# EAGLE board mega_simplest_classboard_redux (EAGLE 6.5.0)
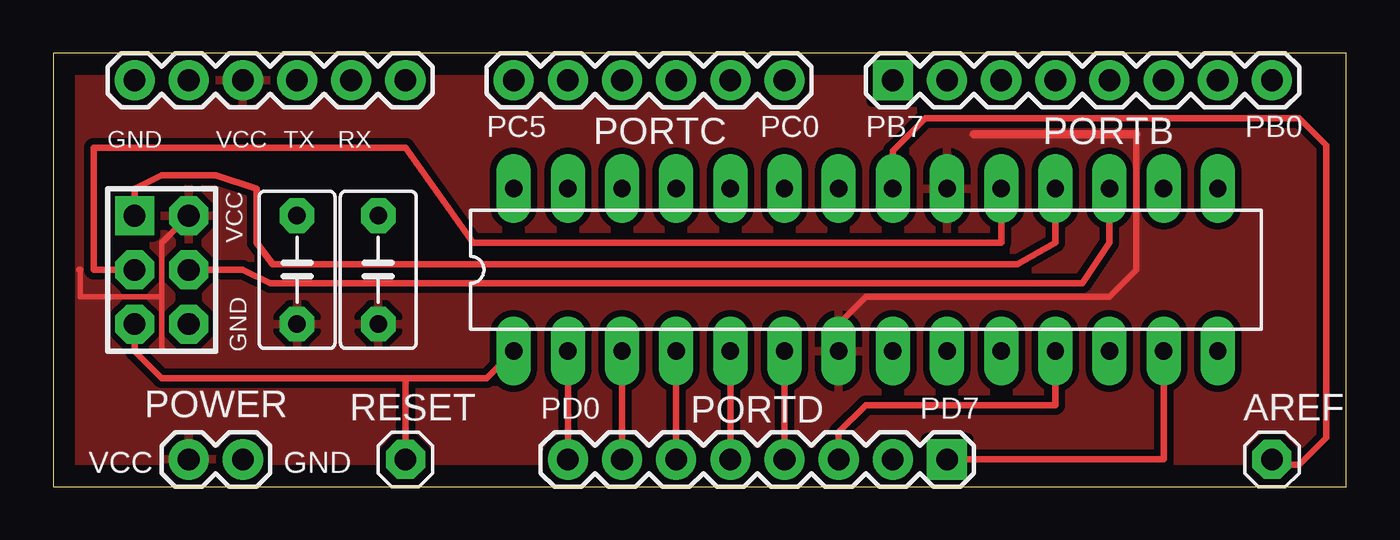
[diagram p0: board, top side]
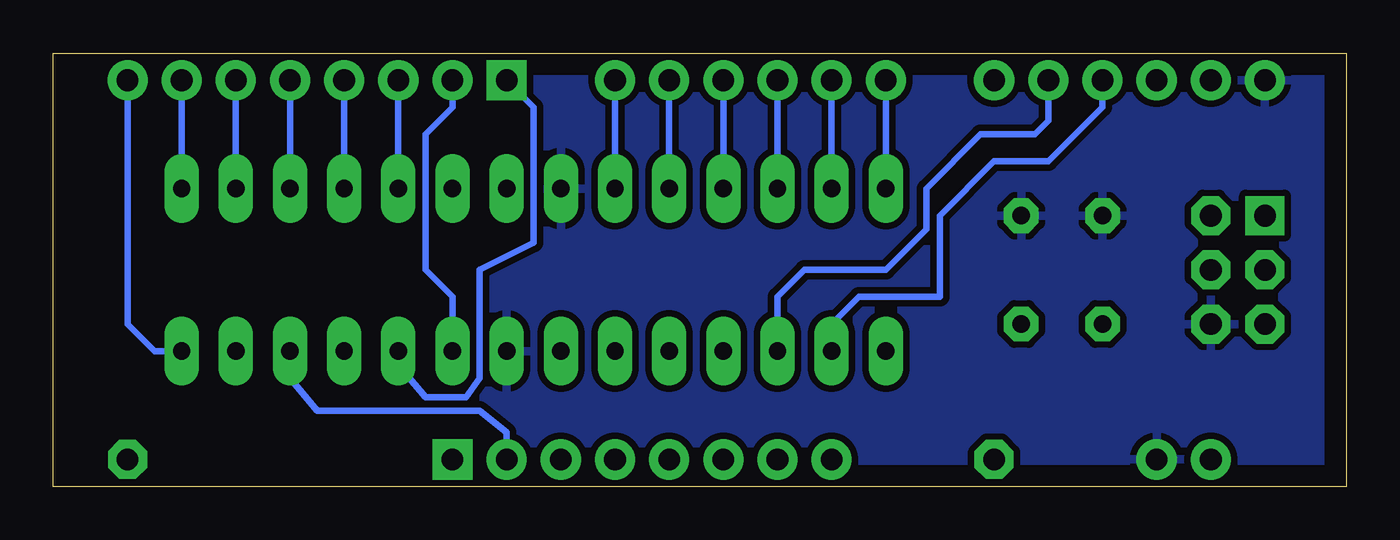
[diagram p1: board, bottom side, seen from below]

Size 60.63 x 20.31 mm. Coordinates in mm from the lower left corner, seen from the top.
Outline: 0,0 60.63,0 60.63,20.31 0,20.31 0,0
Copper layers (1*16): Top 0.035mm / dielectric 1.5mm / Bottom 0.035mm
Design rules "improved_12mil": minimum track width 12mil, minimum drill 0.8mm, track to track 12mil, track to pad 12mil, pad to pad 12mil, via to via 12mil, smd to smd 12mil, copper to edge 40mil, drill to drill 12mil, minimum pad ring 16mil, minimum via ring 16mil, stop-mask expansion 4mil, vias tented up to drill 0mil, thermal gap 12mil

## Footprints (pad centres in the part's own frame; a part is rotated, then mirrored left to right if it is on the bottom)
1X01 = drill 1.016 octagon: 1 0,0
C5B3.5 = drill 0.813 pad 1.6 octagon: 1 -2.54,0; 2 2.54,0
1X06 = drill 1.016 pad 1.88: 1 0,0; 2 2.54,0; 3 5.08,0; 4 7.62,0; 5 10.16,0; 6 12.7,0
DIL28-3 = drill 0.813 long: 1 -16.51,-3.81; 2 -13.97,-3.81; 3 -11.43,-3.81; 4 -8.89,-3.81; 5 -6.35,-3.81; 6 -3.81,-3.81; 7 -1.27,-3.81; 8 1.27,-3.81; 9 3.81,-3.81; 10 6.35,-3.81; 11 8.89,-3.81; 12 11.43,-3.81; 13 13.97,-3.81; 14 16.51,-3.81; 15 16.51,3.81; 16 13.97,3.81; 17 11.43,3.81; 18 8.89,3.81; 19 6.35,3.81; 20 3.81,3.81; 21 1.27,3.81; 22 -1.27,3.81; 23 -3.81,3.81; 24 -6.35,3.81; 25 -8.89,3.81; 26 -11.43,3.81; 27 -13.97,3.81; 28 -16.51,3.81
AVR-ISP-6 = drill 1.016 square: 1 -2.54,-1.27 | drill 1.016 octagon: 2 -2.54,1.27; 3 0,-1.27; 4 0,1.27; 5 2.54,-1.27; 6 2.54,1.27
1X08 = drill 1.016 pad 1.88 square: 1 0,0 | drill 1.016 pad 1.88: 2 2.54,0; 3 5.08,0; 4 7.62,0; 5 10.16,0; 6 12.7,0; 7 15.24,0; 8 17.78,0
1X02 = drill 1.016 pad 1.88: 1 0,0; 2 2.54,0

## Placement (x,y rotation side)
AREF  [1X01]  57.15,1.27 0 top
BUFFER  1u  [C5B3.5]  15.24,10.16 90 top
BUFFER1  0.1u  [C5B3.5]  11.43,10.16 90 top
FTDI  [1X06]  16.51,19.05 180 top
IC1  MEGA8-P  [DIL28-3]  38.1,10.16 0 top
ISP  AVR-ISP-6  [AVR-ISP-6]  5.08,10.16 270 top
PORTB  [1X08]  39.37,19.05 0 top
PORTC  [1X06]  21.59,19.05 0 top
PORTD  [1X08]  41.91,1.27 180 top
POWER  M02PTH  [1X02]  8.89,1.27 180 top
RESET  [1X01]  16.51,1.27 0 top

## Library data of the parts
AREF RESET = pinhead
BUFFER BUFFER1 = capacitor-wima
FTDI PORTB PORTC PORTD POWER = SparkFun-Connectors
IC1 = atmel
ISP = atmel-1

## Nets
AREF: AREF.1 IC1.21
GND: BUFFER1.2 BUFFER.2 FTDI.6 IC1.8 IC1.22 ISP.6 POWER.1
PORTB0: IC1.14 PORTB.8
PORTB1: IC1.15 PORTB.7
PORTB2: IC1.16 PORTB.6
PORTB3: IC1.17 ISP.4 PORTB.5
PORTB4: IC1.18 ISP.1 PORTB.4
PORTB5: IC1.19 ISP.3 PORTB.3
PORTB6: IC1.9 PORTB.2
PORTB7: IC1.10 PORTB.1
PORTC0: IC1.23 PORTC.6
PORTC1: IC1.24 PORTC.5
PORTC2: IC1.25 PORTC.4
PORTC3: IC1.26 PORTC.3
PORTC4: IC1.27 PORTC.2
PORTC5: IC1.28 PORTC.1
PORTD0: FTDI.3 IC1.2 PORTD.8
PORTD1: FTDI.2 IC1.3 PORTD.7
PORTD2: IC1.4 PORTD.6
PORTD3: IC1.5 PORTD.5
PORTD4: IC1.6 PORTD.4
PORTD5: IC1.11 PORTD.3
PORTD6: IC1.12 PORTD.2
PORTD7: IC1.13 PORTD.1
RESET: IC1.1 ISP.5 RESET.1
VCC: BUFFER1.1 BUFFER.1 FTDI.4 IC1.7 IC1.20 ISP.2 POWER.2

## Tracks (layer width: path | path; a pad name or v marks a point on that pad's centre or on a via)
AREF
  Top 0.305: IC1.21 39.37,15.75 40.89,17.27 58.42,17.27 59.69,16 59.69,2.29 58.42,1.02 57.4,1.02 AREF.1
GND
  Bottom 0.305: BUFFER1.2
  pour Bottom: -1.27,26.67 -1.27,-5.08 64.77,-5.08 64.77,26.67
PORTB0
  Bottom 0.305: IC1.14 55.88,6.35 57.15,7.62 PORTB.8
PORTB1
  Bottom 0.305: IC1.15 PORTB.7
PORTB2
  Bottom 0.305: IC1.16 PORTB.6
PORTB3
  Top 0.305: IC1.17 49.53,11.43 48.26,9.53 10.16,9.53 8.89,10.16 ISP.4
  Bottom 0.305: PORTB.5 IC1.17
PORTB4
  Top 0.305: IC1.18 46.99,11.43 45.21,10.41 10.29,10.41 9.53,11.43 9.53,13.97 7.62,14.61 5.08,14.61 3.81,13.97 ISP.1
  Bottom 0.305: PORTB.4 IC1.18
PORTB5
  Top 0.305: IC1.19 44.45,11.43 19.68,11.43 16.51,15.87 1.9,15.87 1.9,10.16 ISP.3
  Bottom 0.305: PORTB.3 IC1.19
PORTB6
  Bottom 0.305: IC1.9 41.91,8.89 43.18,10.16 43.18,16.51 41.91,17.78 PORTB.2
PORTB7
  Bottom 0.305: IC1.10 44.45,5.71 43.18,4.19 41.27,4.19 40.64,5.08 40.64,10.16 38.1,11.43 38.1,17.78 PORTB.1
PORTC0
  Bottom 0.305: PORTC.6 IC1.23
PORTC1
  Bottom 0.305: IC1.24 PORTC.5
PORTC2
  Bottom 0.305: PORTC.4 IC1.25
PORTC3
  Bottom 0.305: IC1.26 PORTC.3
PORTC4
  Bottom 0.305: PORTC.2 IC1.27
PORTC5
  Bottom 0.305: IC1.28 PORTC.1
PORTD0
  Top 0.305: IC1.2 PORTD.8
  Bottom 0.305: IC1.2 24.13,7.62 22.86,8.89 19.05,8.89 19.05,12.7 16.51,15.24 13.97,15.24 11.43,17.78 FTDI.3
PORTD1
  Top 0.305: PORTD.7 IC1.3
  Bottom 0.305: IC1.3 26.67,8.89 25.4,10.16 21.59,10.16 19.68,12.07 19.68,13.97 17.14,16.51 14.6,16.51 13.97,17.14 FTDI.2
PORTD2
  Top 0.305: IC1.4 PORTD.6
PORTD3
  Top 0.305: IC1.5 PORTD.5
PORTD4
  Top 0.305: IC1.6 PORTD.4
PORTD5
  Top 0.305: IC1.11 46.99,3.81 38.1,3.81 36.83,2.54 PORTD.3
PORTD6
  Bottom 0.305: IC1.12 49.53,5.08 48.26,3.56 40.64,3.56 39.37,2.54 PORTD.2
PORTD7
  Top 0.305: IC1.13 52.07,1.27 PORTD.1
RESET
  Top 0.305: ISP.5 3.81,6.35 5.08,5.08 16.51,5.08 | 16.51,5.08 20.32,5.08 IC1.1 | RESET.1 16.51,5.08
VCC
  Top 0.254: 5.08,8.89 5.08,6.35 | 1.27,10.16 1.27,8.89 5.08,8.89 | 5.08,8.89 5.08,11.43 ISP.2
  Top 0.305: IC1.7 | 36.83,5.08 IC1.7 | 1.27,10.16 1.22,10.16 | ISP.2 6.4,12.65 | 50.8,16.51 50.8,10.16 49.53,8.89 38.1,8.89 36.83,7.62 IC1.7
  Top 0.406: IC1.20 41.91,15.24 | 43.18,16.51 50.8,16.51
  pour Top: -1.27,26.67 -1.27,-5.08 63.5,-5.08 63.5,26.67

## Text on the board
tNames: GND | VCC | TX | RX | PC5 | PC0 | PB7 | PB0 | VCC | GND | PD0 | PD7 | VCC | GND